# Altium PCB msr50.PcbDoc (part 4 of 8)
Units mil, origin at the board's own origin, x right, y up, seen from the top; angles counter-clockwise.
Board outline 3925 x 3925 mil, 2 copper layers (TopLayer, BottomLayer); 109 components, 122 nets, 846 pads, 52 vias.
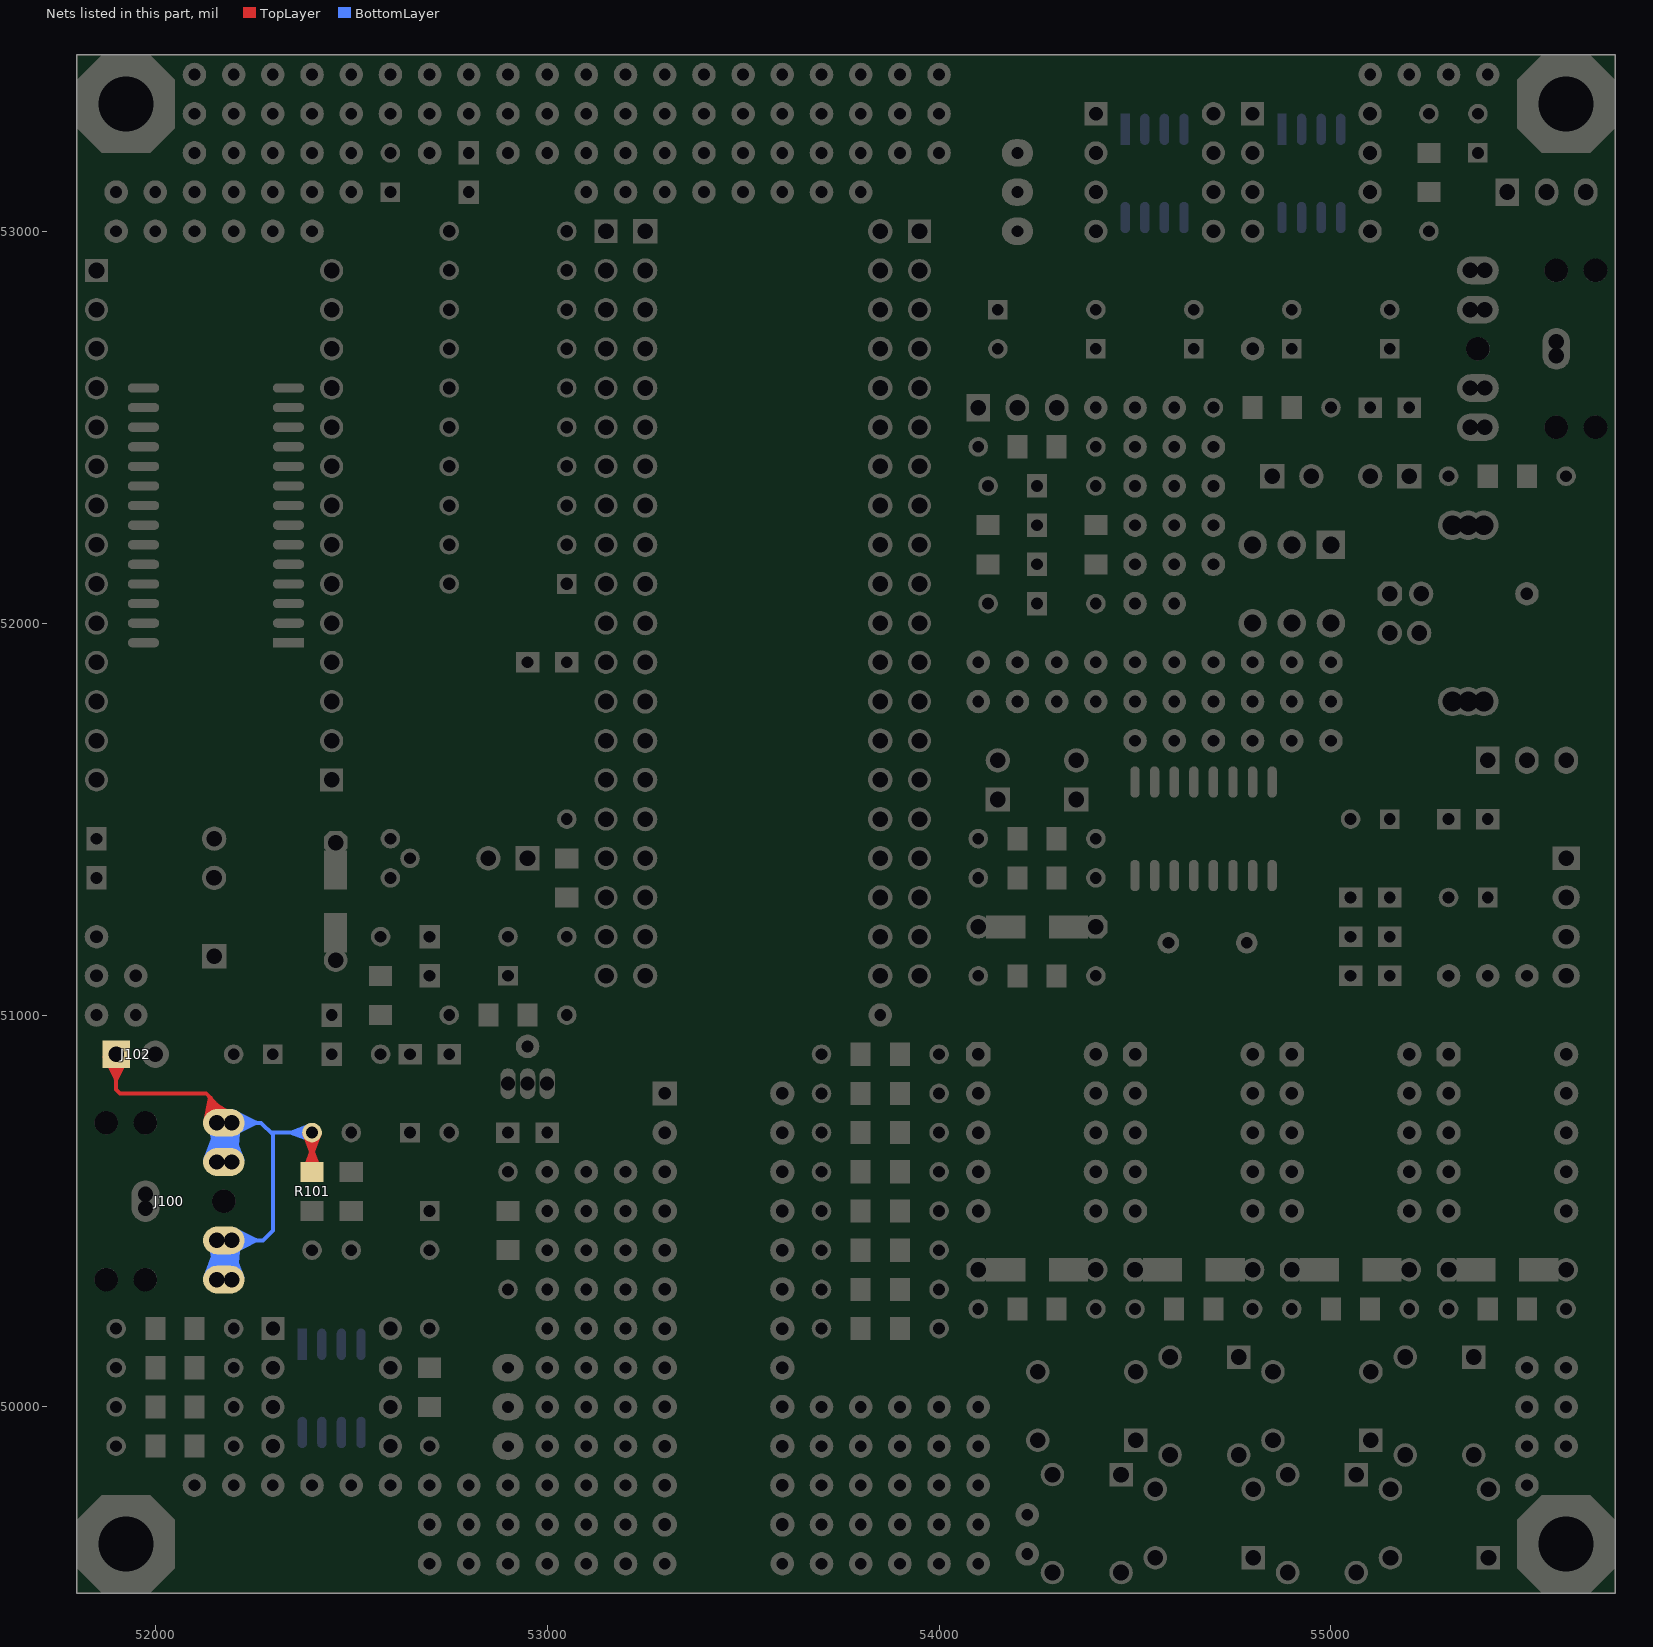
[diagram p4: the nets of this part, all layers, seen from the top]

## Via types
v1: diameter 30, hole 14, TopLayer to BottomLayer, 40 vias
v2: diameter 50, hole 28, TopLayer to BottomLayer, 12 vias

## Nets (pads, with @x,y where several pads share a name; then routed paths per layer and width w, separated by ;. In a path a pad name is that pad's centre, name@x,y a point inside that pad or via, vN(x,y) a via of type N, cw(c..) or ccw(c..) an arc to the next point about the centre after c; other vN are vias at no path point) (continued)
NetJ100_2: (continued)
  BottomLayer w10: J100.5@52127.07,50328.67 J100.4@52150.43,50394.68 ; J100.3@52127.07,50628.67 J100.2@52150.43,50694.68 ; J100.5@52136.87,50325.99 J100.4@52150.43,50394.68 ; J100.3@52136.87,50625.99 J100.2@52150.43,50694.68 ; J100.5@52138.66,50325.1 52148.29,50383.84 ; J100.5@52138.67,50325.58 52149.67,50379.89 ; J100.3@52138.66,50625.1 52148.29,50683.84 ; J100.3@52138.67,50625.58 52149.67,50679.89 ; J100.5@52138.72,50326.42 52152.02,50378.48 ; J100.4@52138.69,50424.06 52150.93,50366.11 ; J100.3@52138.72,50626.42 52152.02,50678.48 ; J100.2@52138.68,50724.06 52150.93,50666.11 ; J100.5@52138.74,50326.72 52153.1,50380.78 ; J100.5@52138.77,50327.05 52154.05,50380.32 ; J100.4@52138.74,50423.25 52153.58,50365.06 ; J100.3@52138.74,50626.72 52153.1,50680.78 ; J100.3@52138.77,50627.05 52154.05,50680.32 ; J100.2@52138.74,50723.25 52153.58,50665.06 ; J100.5@52138.78,50327.09 52154.64,50384.47 ; J100.5@52138.82,50327.4 52155.14,50380.72 ; J100.4@52138.82,50422.6 52155.14,50369.28 ; J100.4@52138.81,50422.68 52155.31,50365.95 ; J100.3@52138.78,50627.09 52154.64,50684.47 ; J100.3@52138.82,50627.4 52155.14,50680.72 ; J100.2@52138.82,50722.6 52155.14,50669.28 ; J100.2@52138.81,50722.68 52155.31,50665.95 ; J100.5@52138.85,50327.61 52155.48,50378.7 ; J100.3@52138.85,50627.61 52155.48,50678.7 ; J100.5@52138.91,50328.06 52156.78,50378.71 ; J100.5@52138.92,50328.09 52157.29,50381.23 ; J100.4@52138.91,50421.94 52156.78,50371.29 ; J100.3@52138.91,50628.06 52156.78,50678.71 ; J100.3@52138.92,50628.09 52157.29,50681.23 ; J100.2@52138.91,50721.94 52156.78,50671.29 ; J100.5@52138.94,50328.23 52157.28,50378.62 ; J100.5@52138.97,50328.39 J100.4@52162.05,50401.91 ; J100.4@52138.97,50421.6 52158.65,50366.65 ; J100.4@52138.94,50421.77 52157.28,50371.38 ; J100.3@52138.94,50628.23 52157.28,50678.62 ; J100.3@52138.97,50628.39 J100.2@52162.05,50701.91 ; J100.2@52138.97,50721.6 52158.65,50666.65 ; J100.2@52138.94,50721.77 52157.28,50671.38 ; J100.5@52138.97,50328.4 52159.4,50387.34 ; J100.5@52138.98,50328.44 52158.05,50379.43 ; J100.5@52139.01,50328.59 52160.17,50388.07 ; J100.5@52139.02,50328.66 52158.67,50379.36 ; J100.4@52138.98,50421.6 52159.4,50362.66 ; J100.3@52138.97,50628.4 52159.4,50687.34 ; J100.3@52138.98,50628.44 52158.05,50679.43 ; J100.3@52139.01,50628.59 52160.17,50688.07 ; J100.3@52139.02,50628.66 52158.67,50679.36 ; J100.2@52138.97,50721.6 52159.4,50662.66 ; J100.4@52139.06,50421.18 52159.83,50367.44 ; J100.2@52139.06,50721.18 52159.83,50667.44 ; J100.5@52139.11,50329.08 52159.82,50378.72 ; J100.4@52139.1,50420.98 J100.5@52163.04,50355.84 ; J100.4@52139.08,50421.08 52161.39,50361.73 ; J100.3@52139.11,50629.08 52159.82,50678.72 ; J100.2@52139.1,50720.98 J100.3@52163.04,50655.84 ; J100.2@52139.08,50721.08 52161.39,50661.73 ; J100.5@52139.33,50329.96 J100.4@52169.49,50404.1 ; J100.5@52139.35,50330.01 52162.79,50379.28 ; J100.4@52139.36,50419.94 52164.92,50363.63 ; J100.4@52139.33,50420.04 52163.14,50368.83 ; J100.3@52139.33,50629.96 J100.2@52169.49,50704.1 ; J100.3@52139.35,50630.01 52162.79,50679.28 ; J100.2@52139.36,50719.94 52164.92,50663.63 ; J100.2@52139.33,50720.04 52163.14,50668.83 ; J100.5@52139.48,50330.45 52165.25,50382.86 ; J100.4@52139.52,50419.4 52166.96,50363.34 ; J100.3@52139.48,50630.45 52165.25,50682.86 ; J100.2@52139.52,50719.4 52166.96,50663.34 ; J100.4@52139.57,50419.25 J100.5@52169.69,50356.67 ; J100.2@52139.57,50719.25 J100.3@52169.69,50656.67 ; J100.5@52139.72,50331.19 52167.42,50381.75 ; J100.3@52139.72,50631.19 52167.42,50681.75 ; J100.4@52139.82,50418.53 52167.16,50371.55 ; J100.2@52139.82,50718.53 52167.16,50671.55 ; J100.5@52139.87,50331.61 J100.4@52177.71,50405.04 ; J100.4@52139.84,50418.47 52170.54,50363 ; J100.3@52139.87,50631.61 J100.2@52177.71,50705.04 ; J100.2@52139.84,50718.47 52170.54,50663 ; J100.5@52139.89,50331.66 52167.92,50378.8 ; J100.3@52139.89,50631.66 52167.92,50678.8 ; J100.4@52139.97,50418.15 52171.06,50364.9 ; J100.2@52139.97,50718.15 52171.06,50664.9 ; J100.5@52140.08,50332.14 52171.01,50382.36 ; J100.4@52140.12,50417.77 52172.17,50365.72 ; J100.3@52140.08,50632.14 52171.01,50682.36 ; J100.2@52140.12,50717.77 52172.17,50665.72 ; J100.4@52140.15,50417.7 52171.36,50368.23 ; J100.2@52140.15,50717.7 52171.36,50668.23 ; J100.4@52140.21,50417.56 J100.5@52176.13,50358.42 ; J100.2@52140.21,50717.56 J100.3@52176.13,50658.42 ; J100.5@52140.36,50332.76 52173.05,50381.71 ; J100.4@52140.34,50417.27 52171.54,50371.29 ; J100.3@52140.36,50632.76 52173.05,50681.71 ; J100.2@52140.34,50717.27 52171.54,50671.29 ; J100.4@52140.46,50417.01 52176.39,50363.06 ; J100.2@52140.46,50717.01 52176.39,50663.06 ; J100.5@52140.61,50333.29 52173.22,50377.95 ; J100.3@52140.61,50633.29 52173.22,50677.95 ; J100.4@52140.79,50416.35 52176.29,50368.7 ; J100.2@52140.79,50716.35 52176.29,50668.7 ; J100.4@52140.85,50416.25 52176.71,50368.7 ; J100.2@52140.85,50716.25 52176.71,50668.7 ; J100.5@52140.88,50333.81 52174.92,50377.54 ; J100.5@52140.9,50333.86 52176.95,50380.93 ; J100.3@52140.88,50633.81 52174.92,50677.54 ; J100.3@52140.9,50633.86 52176.95,50680.93 ; J100.4@52140.94,50416.08 52176.47,50370.43 ; J100.2@52140.94,50716.08 52176.47,50670.43 ; J100.4@52140.98,50416 52181.97,50361.01 ; J100.2@52140.98,50716 52181.97,50661.01 ; J100.5@52141.43,50334.77 52178.6,50377.34 ; J100.5@52141.47,50334.83 52178.5,50376.79 ; J100.3@52141.43,50634.77 52178.6,50677.34 ; J100.3@52141.47,50634.83 52178.5,50676.79 ; J100.4@52141.54,50415.06 52181.25,50369.58 ; J100.2@52141.54,50715.06 52181.25,50669.58 ; J100.4@52141.58,50414.99 52181.27,50370.06 ; J100.2@52141.58,50714.99 52181.27,50670.06 ; J100.4@52141.63,50414.91 52180.44,50371.92 ; J100.2@52141.63,50714.91 52180.44,50671.92 ; J100.4@52141.69,50414.83 52181.94,50370.14 ; J100.2@52141.69,50714.83 52181.94,50670.14 ; J100.4@52141.83,50414.61 52186.92,50364.23 ; J100.2@52141.83,50714.61 52186.92,50664.23 ; J100.4@52142.11,50414.2 52184.45,50370.8 ; J100.2@52142.11,50714.2 52184.45,50670.8 ; J100.5@52142.15,50335.85 52183.81,50378.01 ; J100.3@52142.15,50635.85 52183.81,50678.01 ; J100.4@52142.25,50414.01 52185.24,50370.97 ; J100.2@52142.25,50714.01 52185.24,50670.97 ; J100.5@52142.28,50336.03 52182.74,50375.33 ; J100.3@52142.28,50636.03 52182.74,50675.33 ; J100.5@52142.36,50336.14 52185.8,50378.73 ; J100.4@52142.35,50413.88 52186,50370.84 ; J100.3@52142.36,50636.14 52185.8,50678.73 ; J100.2@52142.35,50713.88 52186,50670.84 ; J100.5@52142.4,50336.2 52185.94,50378.56 ; J100.3@52142.4,50636.2 52185.94,50678.56 ; J100.5@52142.43,50336.23 52186.18,50378.67 ; J100.4@52142.47,50413.71 52183.9,50374.71 ; J100.3@52142.43,50636.23 52186.18,50678.67 ; J100.2@52142.47,50713.71 52183.9,50674.71 ; J100.5@52142.8,50336.7 52188.3,50378.19 ; J100.5@52142.82,50336.73 52187.28,50376.78 ; J100.4@52142.78,50413.32 52191.14,50368.08 ; J100.3@52142.8,50636.7 52188.3,50678.19 ; J100.3@52142.82,50636.73 52187.28,50676.78 ; J100.2@52142.78,50713.32 52191.14,50668.08 ; J100.5@52142.88,50336.81 52191.65,50381.6 ; J100.5@52142.9,50336.83 52189.17,50378.44 ; J100.3@52142.88,50636.81 52191.65,50681.6 ; J100.3@52142.9,50636.83 52189.17,50678.44 ; J100.5@52142.98,50336.92 52189.03,50377.65 ; J100.3@52142.98,50636.92 52189.03,50677.65 ; J100.5@52143.25,50337.24 52190.48,50377.23 ; J100.4@52143.25,50412.76 52190.7,50372.49 ; J100.3@52143.25,50637.24 52190.48,50677.23 ; J100.2@52143.25,50712.76 52190.7,50672.49 ; J100.5@52143.37,50337.38 52191.08,50376.98 ; J100.3@52143.37,50637.38 52191.08,50676.98 ; J100.4@52143.74,50412.22 52192.95,50373.61 ; J100.2@52143.74,50712.22 52192.95,50673.61 ; J100.4@52143.83,50412.12 52193.26,50373.94 ; J100.2@52143.83,50712.12 52193.26,50673.94 ; J100.5@52143.88,50337.92 52193.48,50375.96 ; J100.3@52143.88,50637.92 52193.48,50675.96 ; J100.5@52144.35,50338.4 52195.68,50375.02 ; J100.3@52144.35,50638.4 52195.68,50675.02 ; J100.5@52144.43,50338.47 52196.1,50374.9 ; J100.3@52144.43,50638.47 52196.1,50674.9 ; J100.4@52144.53,50411.43 52196.52,50375.38 ; J100.2@52144.53,50711.43 52196.52,50675.38 ; J100.5@52144.61,50323.35 J100.4@52155.75,50398.74 ; J100.5@52144.59,50323.87 J100.4@52157.28,50392.23 ; J100.5@52144.58,50325.9 J100.4@52162.05,50401.91 ; J100.4@52144.59,50426.13 J100.5@52157.28,50357.77 ; J100.3@52144.61,50623.35 J100.2@52155.75,50698.74 ; J100.3@52144.59,50623.87 J100.2@52157.28,50692.23 ; J100.3@52144.58,50625.9 J100.2@52162.05,50701.91 ; J100.2@52144.59,50726.13 J100.3@52157.28,50657.77 ; J100.5@52144.8,50328.75 J100.4@52169.49,50404.1 ; J100.3@52144.8,50628.75 J100.2@52169.49,50704.1 ; J100.4@52145.17,50410.86 52199.31,50376.74 ; J100.2@52145.17,50710.86 52199.31,50676.74 ; J100.5@52145.33,50331.79 J100.4@52177.71,50405.04 ; J100.3@52145.33,50631.79 J100.2@52177.71,50705.04 ; J100.4@52145.85,50410.3 52202.18,50378.27 ; J100.2@52145.85,50710.3 52202.18,50678.27 ; J100.5@52146.21,50334.86 J100.4@52186.2,50404.66 ; J100.3@52146.21,50634.86 J100.2@52186.2,50704.66 ; J100.5@52146.85,50324.75 J100.4@52150.43,50394.68 ; J100.3@52146.85,50624.75 J100.2@52150.43,50694.68 ; J100.5@52148.66,50324.85 52152.02,50378.48 ; J100.5@52148.66,50325.02 52153.1,50380.78 ; J100.5@52148.66,50325.24 52154.64,50384.47 ; J100.5@52148.67,50325.34 52155.14,50380.72 ; J100.5@52148.67,50325.4 52155.48,50378.7 ; J100.4@52148.67,50424.62 J100.5@52155.99,50355.89 ; J100.4@52148.67,50424.68 52155.32,50360.85 ; J100.4@52148.66,50424.91 52153.58,50365.06 ; J100.4@52148.67,50425.3 52150.93,50366.11 ; J100.3@52148.66,50624.85 52152.02,50678.48 ; J100.3@52148.66,50625.02 52153.1,50680.78 ; J100.3@52148.66,50625.24 52154.64,50684.47 ; J100.3@52148.67,50625.34 52155.14,50680.72 ; J100.3@52148.67,50625.4 52155.48,50678.7 ; J100.2@52148.67,50724.62 J100.3@52155.99,50655.89 ; J100.2@52148.67,50724.68 52155.32,50660.85 ; J100.2@52148.66,50724.91 52153.58,50665.06 ; J100.2@52148.67,50725.3 52150.93,50666.11 ; J100.5@52148.69,50324.32 52148.29,50383.84 ; J100.5@52148.68,50324.48 52149.67,50379.89 ; J100.5@52148.68,50325.61 52156.78,50378.71 ; J100.5@52148.69,50325.66 52157.29,50381.23 ; J100.5@52148.69,50325.69 52157.28,50378.62 ; J100.5@52148.7,50325.8 52158.05,50379.43 ; J100.5@52148.72,50326.03 52159.89,50382.89 ; J100.4@52148.72,50423.98 52159.83,50367.44 ; J100.4@52148.72,50424.03 52159.79,50364.79 ; J100.4@52148.7,50424.16 52158.65,50366.65 ; J100.4@52148.69,50424.31 52157.28,50371.38 ; J100.4@52148.68,50424.39 52156.78,50371.29 ; J100.3@52148.69,50624.32 52148.29,50683.84 ; J100.3@52148.68,50624.48 52149.67,50679.89 ; J100.3@52148.68,50625.61 52156.78,50678.71 ; J100.3@52148.69,50625.66 52157.29,50681.23 ; J100.3@52148.69,50625.69 52157.28,50678.62 ; J100.3@52148.7,50625.8 52158.05,50679.43 ; J100.3@52148.72,50626.03 52159.89,50682.89 ; J100.2@52148.72,50723.98 52159.83,50667.44 ; J100.2@52148.72,50724.03 52159.79,50664.79 ; J100.2@52148.7,50724.16 52158.65,50666.65 ; J100.2@52148.69,50724.31 52157.28,50671.38 ; J100.2@52148.68,50724.39 52156.78,50671.29 ; J100.5@52148.73,50326.09 52159.82,50378.72 ; J100.5@52148.77,50326.38 52162.11,50381.58 ; J100.4@52148.75,50423.75 J100.5@52163.04,50355.84 ; J100.4@52148.74,50423.86 52161.39,50361.73 ; J100.3@52148.73,50626.09 52159.82,50678.72 ; J100.3@52148.77,50626.38 52162.11,50681.58 ; J100.2@52148.75,50723.75 J100.3@52163.04,50655.84 ; J100.2@52148.74,50723.86 52161.39,50661.73 ; J100.5@52148.8,50326.55 52162.79,50379.28 ; J100.4@52148.8,50423.45 52163.14,50368.83 ; J100.3@52148.8,50626.55 52162.79,50679.28 ; J100.2@52148.8,50723.45 52163.14,50668.83 ; J100.5@52148.85,50326.8 52165.25,50382.86 ; J100.5@52148.86,50326.85 52164.61,50378.55 ; J100.3@52148.85,50626.8 52165.25,50682.86 ; J100.3@52148.86,50626.85 52164.61,50678.55 ; J100.4@52148.88,50423.08 52166.96,50363.34 ; J100.2@52148.88,50723.08 52166.96,50663.34 ; J100.4@52148.96,50422.77 52167.16,50371.55 ; J100.2@52148.96,50722.77 52167.16,50671.55 ; J100.5@52149.05,50327.57 J100.4@52177.71,50405.04 ; J100.4@52149.03,50422.49 52171.06,50364.9 ; J100.3@52149.05,50627.57 J100.2@52177.71,50705.04 ; J100.2@52149.03,50722.49 52171.06,50664.9 ; J100.5@52149.17,50327.91 52173.05,50381.71 ; J100.3@52149.17,50627.91 52173.05,50681.71 ; J100.5@52149.25,50328.12 52173.22,50377.95 ; J100.4@52149.23,50421.92 52176.39,50363.06 ; J100.3@52149.25,50628.12 52173.22,50677.95 ; J100.2@52149.23,50721.92 52176.39,50663.06 ; J100.5@52149.37,50328.42 52176.91,50381.32 ; J100.4@52149.36,50421.6 52176.71,50368.7 ; J100.4@52149.34,50421.66 52176.29,50368.7 ; J100.3@52149.37,50628.42 52176.91,50681.32 ; J100.2@52149.36,50721.6 52176.71,50668.7 ; J100.2@52149.34,50721.66 52176.29,50668.7 ; J100.5@52149.38,50328.44 52176.95,50380.93 ; J100.4@52149.39,50421.54 52176.47,50370.43 ; J100.3@52149.38,50628.44 52176.95,50680.93 ; J100.2@52149.39,50721.54 52176.47,50670.43 ; J100.4@52149.45,50421.4 52181.97,50361.01 ; J100.2@52149.45,50721.4 52181.97,50661.01 ; J100.4@52149.52,50421.25 52179.28,50369.54 ; J100.2@52149.52,50721.25 52179.28,50669.54 ; J100.5@52149.57,50328.85 52178.6,50377.34 ; J100.4@52149.56,50408.05 J100.4@52199.79,50395.4 ; J100.4@52149.55,50421.18 52182.68,50363.86 ; J100.4@52149.56,50441.95 J100.4@52199.79,50454.6 ; J100.3@52149.57,50628.85 52178.6,50677.34 ; J100.2@52149.56,50708.05 J100.2@52199.79,50695.4 ; J100.2@52149.55,50721.18 52182.68,50663.86 ; J100.2@52149.56,50741.95 J100.2@52199.79,50754.6 ; J100.5@52149.58,50328.87 52178.5,50376.79 ; J100.5@52149.62,50328.96 52180.25,50378.8 ; J100.3@52149.58,50628.87 52178.5,50676.79 ; J100.3@52149.62,50628.96 52180.25,50678.8 ; J100.5@52149.63,50328.97 52180.95,50380.03 ; J100.4@52149.66,50420.97 52180.44,50371.92 ; J100.3@52149.63,50628.97 52180.95,50680.03 ; J100.2@52149.66,50720.97 52180.44,50671.92 ; J100.4@52149.69,50420.91 52181.94,50370.14 ; J100.2@52149.69,50720.91 52181.94,50670.14 ; J100.4@52149.79,50420.73 52186.92,50364.23 ; J100.2@52149.79,50720.73 52186.92,50664.23 ; J100.5@52149.87,50329.41 52183.81,50378.01 ; J100.4@52149.87,50420.6 52184.45,50370.8 ; J100.3@52149.87,50629.41 52183.81,50678.01 ; J100.2@52149.87,50720.6 52184.45,50670.8 ; J100.5@52149.91,50329.47 52182.74,50375.33 ; J100.3@52149.91,50629.47 52182.74,50675.33 ; J100.5@52149.97,50329.57 52185.8,50378.73 ; J100.4@52149.97,50420.44 52186,50370.84 ; J100.4@52149.93,50420.51 52185.24,50370.97 ; J100.3@52149.97,50629.57 52185.8,50678.73 ; J100.2@52149.97,50720.44 52186,50670.84 ; J100.2@52149.93,50720.51 52185.24,50670.97 ; J100.4@52149.99,50420.4 52183.9,50374.71 ; J100.2@52149.99,50720.4 52183.9,50674.71 ; J100.5@52150.2,50329.92 52189.17,50378.44 ; J100.5@52150.22,50329.95 52191.65,50381.6 ; J100.4@52150.22,50420.05 52189.08,50372.14 ; J100.4@52150.18,50420.12 52191.14,50368.08 ; J100.3@52150.2,50629.92 52189.17,50678.44 ; J100.3@52150.22,50629.95 52191.65,50681.6 ; J100.2@52150.22,50720.05 52189.08,50672.14 ; J100.2@52150.18,50720.12 52191.14,50668.08 ; J100.5@52150.23,50329.96 52189.03,50377.65 ; J100.4@52150.23,50420.04 52189.05,50372.29 ; J100.3@52150.23,50629.96 52189.03,50677.65 ; J100.2@52150.23,50720.04 52189.05,50672.29 ; J100.5@52150.35,50330.12 52190.48,50377.23 ; J100.4@52150.35,50419.88 52190.7,50372.49 ; J100.3@52150.35,50630.12 52190.48,50677.23 ; J100.2@52150.35,50719.88 52190.7,50672.49 ; J100.5@52150.4,50330.19 52191.08,50376.98 ; J100.3@52150.4,50630.19 52191.08,50676.98 ; J100.4@52150.56,50419.61 52192.95,50373.61 ; J100.2@52150.56,50719.61 52192.95,50673.61 ; J100.5@52150.61,50330.47 52193.48,50375.96 ; J100.4@52150.6,50419.56 52193.26,50373.94 ; J100.3@52150.61,50630.47 52193.48,50675.96 ; J100.2@52150.59,50719.56 52193.26,50673.94 ; J100.5@52150.82,50330.7 52195.68,50375.02 ; J100.3@52150.82,50630.7 52195.68,50675.02 ; J100.5@52150.85,50330.75 52196.1,50374.9 ; J100.3@52150.85,50630.75 52196.1,50674.9 ; J100.4@52150.9,50419.2 52196.52,50375.38 ; J100.2@52150.9,50719.2 52196.52,50675.38 ; J100.4@52151.18,50418.91 52199.31,50376.74 ; J100.2@52151.18,50718.91 52199.31,50676.74 ; J100.4@52151.48,50418.63 52202.18,50378.27 ; J100.2@52151.48,50718.63 52202.18,50678.27 ; J100.4@52152.69,50406.95 J100.4@52190.4,50406.95 ; J100.4@52152.69,50443.05 J100.4@52190.4,50443.05 ; J100.2@52152.69,50706.95 J100.2@52190.4,50706.95 ; J100.2@52152.69,50743.05 J100.2@52190.4,50743.05 ; J100.4@52152.96,50417.54 J100.4@52199.79,50395.4 ; J100.4@52152.96,50432.46 J100.4@52199.79,50454.6 ; J100.2@52152.96,50717.54 J100.2@52199.79,50695.4 ; J100.2@52152.96,50732.46 J100.2@52199.79,50754.6 ; J100.4@52154.05,50417.01 J100.4@52190.4,50406.95 ; J100.4@52154.05,50432.99 J100.4@52190.4,50443.05 ; J100.2@52154.05,50717.01 J100.2@52190.4,50706.95 ; J100.2@52154.05,50732.99 J100.2@52190.4,50743.05 ; J100.5@52154.58,50324.27 J100.4@52162.05,50401.91 ; J100.5@52154.6,50326.22 J100.4@52169.49,50404.1 ; J100.3@52154.58,50624.27 J100.2@52162.05,50701.91 ; J100.3@52154.6,50626.22 J100.2@52169.49,50704.1 ; J100.5@52154.72,50322.54 J100.4@52155.75,50398.74 ; J100.5@52154.69,50322.75 J100.4@52157.28,50392.23 ; J100.4@52154.69,50427.25 J100.5@52157.28,50357.77 ; J100.3@52154.72,50622.54 J100.2@52155.75,50698.74 ; J100.3@52154.69,50622.75 J100.2@52157.28,50692.23 ; J100.2@52154.69,50727.25 J100.3@52157.28,50657.77 ; J100.5@52154.83,50328.29 J100.4@52177.71,50405.04 ; J100.3@52154.83,50628.29 J100.2@52177.71,50705.04 ; J100.5@52155.29,50330.39 J100.4@52186.2,50404.66 ; J100.3@52155.29,50630.39 J100.2@52186.2,50704.66 ; J100.4@52156.3,50416.43 J100.4@52194.01,50416.43 ; J100.4@52156.3,50433.57 J100.4@52194.01,50433.57 ; J100.2@52156.3,50716.43 J100.2@52194.01,50716.43 ; J100.2@52156.3,50733.57 J100.2@52194.01,50733.57 ; J100.5@52157.32,50316.38 J100.5@52187.47,50320.8 ; J100.3@52157.32,50616.38 J100.3@52187.47,50620.8 ; J100.4@52157.33,50433.62 J100.4@52187.44,50429.15 ; J100.2@52157.33,50733.62 J100.2@52187.44,50729.15 ; J100.5@52157.4,50316.38 J100.5@52187.32,50321.09 ; J100.3@52157.4,50616.38 J100.3@52187.32,50621.09 ; J100.5@52157.43,50316.38 J100.5@52187.26,50321.19 ; J100.3@52157.43,50616.38 J100.3@52187.26,50621.19 ; J100.4@52157.51,50433.62 J100.4@52187.13,50428.53 ; J100.2@52157.51,50733.62 J100.2@52187.13,50728.53 ; J100.5@52157.57,50316.38 J100.5@52187.05,50321.67 ; J100.3@52157.57,50616.38 J100.3@52187.05,50621.67 ; J100.4@52157.59,50433.62 J100.4@52187.02,50428.25 ; J100.2@52157.59,50733.62 J100.2@52187.02,50728.25 ; J100.4@52157.66,50406.38 J100.4@52194.01,50416.43 ; J100.4@52157.66,50443.62 J100.4@52194.01,50433.57 ; J100.2@52157.66,50706.38 J100.2@52194.01,50716.43 ; J100.2@52157.66,50743.62 J100.2@52194.01,50733.57 ; J100.5@52157.68,50316.39 J100.5@52186.9,50322.04 ; J100.3@52157.68,50616.39 J100.3@52186.9,50622.04 ; J100.5@52157.83,50316.4 J100.5@52186.73,50322.55 ; J100.5@52157.87,50333.6 J100.5@52185.15,50327.42 ; J100.3@52157.83,50616.4 J100.3@52186.73,50622.55 ; J100.3@52157.87,50633.6 J100.3@52185.15,50627.42 ; J100.5@52157.89,50316.4 J100.5@52186.68,50322.75 ; J100.3@52157.89,50616.4 J100.3@52186.68,50622.75 ; J100.4@52157.93,50433.6 J100.4@52186.64,50427.11 ; J100.2@52157.93,50733.6 J100.2@52186.64,50727.11 ; J100.5@52158.18,50333.58 J100.5@52185.34,50326.41 ; J100.3@52158.18,50633.58 J100.3@52185.34,50626.41 ; J100.5@52158.37,50316.45 J100.5@52185.4,50324.22 ; J100.3@52158.37,50616.45 J100.3@52185.4,50624.22 ; J100.5@52158.5,50333.54 J100.5@52185.43,50325.33 ; J100.3@52158.5,50633.54 J100.3@52185.43,50625.33 ; J100.5@52158.7,50316.5 J100.5@52185.43,50325.33 ; J100.3@52158.7,50616.5 J100.3@52185.43,50625.33 ; J100.5@52158.84,50333.48 J100.5@52185.4,50324.22 ; J100.3@52158.84,50633.48 J100.3@52185.4,50624.22 ; J100.5@52159.03,50316.56 J100.5@52185.34,50326.41 ; J100.3@52159.03,50616.56 J100.3@52185.34,50626.41 ; J100.4@52159.15,50416.58 J100.4@52186.64,50427.11 ; J100.2@52159.15,50716.58 J100.2@52186.64,50727.11 ; J100.5@52159.19,50333.41 J100.5@52186.68,50322.75 ; J100.3@52159.19,50633.41 J100.3@52186.68,50622.75 ; J100.5@52159.24,50333.4 J100.5@52186.73,50322.55 ; J100.3@52159.24,50633.4 J100.3@52186.73,50622.55 ; J100.5@52159.3,50333.38 J100.5@52186.8,50322.33 ; J100.3@52159.3,50633.38 J100.3@52186.8,50622.33 ; J100.5@52159.34,50316.63 J100.5@52185.15,50327.42 ; J100.5@52159.33,50333.37 J100.5@52186.84,50322.2 ; J100.3@52159.34,50616.63 J100.3@52185.15,50627.42 ; J100.3@52159.33,50633.37 J100.3@52186.84,50622.2 ; J100.5@52159.38,50333.36 J100.5@52186.9,50322.04 ; J100.3@52159.38,50633.36 J100.3@52186.9,50622.04 ; J100.4@52159.66,50416.71 J100.4@52187.44,50429.15 ; J100.2@52159.66,50716.71 J100.2@52187.44,50729.15 ; J100.5@52160.14,50306.6 J100.5@52187.77,50320.31 ; J100.3@52160.14,50606.6 J100.3@52187.77,50620.31 ; J100.5@52160.22,50306.61 J100.5@52187.69,50320.42 ; J100.4@52160.19,50416.88 J100.4@52194.01,50433.57 ; J100.4@52160.19,50433.12 J100.4@52194.01,50416.43 ; J100.3@52160.22,50606.61 J100.3@52187.69,50620.42 ; J100.2@52160.19,50716.88 J100.2@52194.01,50733.57 ; J100.2@52160.19,50733.12 J100.2@52194.01,50716.43 ; J100.5@52160.47,50306.65 J100.5@52187.47,50320.8 ; J100.3@52160.47,50606.65 J100.3@52187.47,50620.8 ; J100.4@52160.51,50443.34 J100.4@52187.44,50429.15 ; J100.2@52160.51,50743.34 J100.2@52187.44,50729.15 ; J100.5@52160.67,50306.69 J100.5@52187.32,50321.09 ; J100.3@52160.67,50606.69 J100.3@52187.32,50621.09 ; J100.5@52160.74,50306.7 J100.5@52187.26,50321.19 ; J100.3@52160.74,50606.7 J100.3@52187.26,50621.19 ; J100.4@52160.93,50443.26 J100.4@52187.13,50428.53 ; J100.2@52160.93,50743.26 J100.2@52187.13,50728.53 ; J100.5@52161.07,50306.77 J100.5@52187.05,50321.67 ; J100.4@52161.04,50443.24 J100.4@52187.06,50428.37 ; J100.3@52161.07,50606.77 J100.3@52187.05,50621.67 ; J100.2@52161.04,50743.24 J100.2@52187.06,50728.37 ; J100.5@52161.12,50306.78 J100.5@52187.02,50321.75 ; J100.4@52161.12,50443.22 J100.4@52187.02,50428.25 ; J100.4@52161.08,50443.23 J100.4@52187.04,50428.31 ; J100.3@52161.12,50606.78 J100.3@52187.02,50621.75 ; J100.2@52161.12,50743.22 J100.2@52187.02,50728.25 ; J100.2@52161.08,50743.23 J100.2@52187.04,50728.31 ; J100.5@52161.17,50306.79 J100.5@52186.99,50321.82 ; J100.3@52161.17,50606.79 J100.3@52186.99,50621.82 ; J100.5@52161.32,50306.82 J100.5@52186.9,50322.04 ; J100.3@52161.32,50606.82 J100.3@52186.9,50622.04 ; J100.5@52161.43,50306.85 J100.5@52186.84,50322.2 ; J100.3@52161.43,50606.85 J100.3@52186.84,50622.2 ; J100.5@52161.52,50306.87 J100.5@52186.8,50322.33 ; J100.4@52161.48,50443.14 J100.4@52186.82,50427.73 ; J100.3@52161.52,50606.87 J100.3@52186.8,50622.33 ; J100.2@52161.48,50743.14 J100.2@52186.82,50727.73 ; J100.4@52161.53,50443.13 J100.4@52186.8,50427.65 ; J100.2@52161.53,50743.13 J100.2@52186.8,50727.65 ; J100.5@52161.66,50306.9 J100.5@52186.73,50322.55 ; J100.3@52161.66,50606.9 J100.3@52186.73,50622.55 ; J100.5@52161.8,50306.93 J100.5@52186.68,50322.75 ; J100.3@52161.8,50606.93 J100.3@52186.68,50622.75 ; J100.5@52161.94,50343.03 J100.5@52185.15,50327.42 ; J100.3@52161.94,50643.03 J100.3@52185.15,50627.42 ; J100.4@52162.25,50417.95 J100.4@52190.4,50443.05 ; J100.4@52162.25,50432.05 J100.4@52190.4,50406.95 ; J100.2@52162.25,50717.95 J100.2@52190.4,50743.05 ; J100.2@52162.25,50732.05 J100.2@52190.4,50706.95 ; J100.5@52162.57,50342.86 J100.5@52185.34,50326.41 ; J100.3@52162.57,50642.86 J100.3@52185.34,50626.41 ; J100.4@52162.78,50418.36 J100.4@52199.79,50454.6 ; J100.4@52162.78,50431.64 J100.4@52199.79,50395.4 ; J100.2@52162.78,50718.36 J100.2@52199.79,50754.6 ; J100.2@52162.78,50731.64 J100.2@52199.79,50695.4 ; J100.5@52162.96,50307.26 J100.5@52185.4,50324.22 ; J100.3@52162.96,50607.26 J100.3@52185.4,50624.22 ; J100.5@52163.08,50331.9 J100.4@52195.23,50402.91 ; J100.3@52163.08,50631.9 J100.2@52195.23,50702.91 ; J100.5@52163.24,50342.64 J100.5@52185.43,50325.33 ; J100.3@52163.24,50642.64 J100.3@52185.43,50625.33 ; J100.5@52163.65,50307.5 J100.5@52185.43,50325.33 ; J100.3@52163.65,50607.5 J100.3@52185.43,50625.33 ; J100.4@52163.88,50430.55 52202.18,50378.27 ; J100.2@52163.88,50730.55 52202.18,50678.27 ; J100.5@52163.93,50342.39 J100.5@52185.4,50324.22 ; J100.3@52163.93,50642.39 J100.3@52185.4,50624.22 ; J100.4@52164.15,50430.21 52199.31,50376.74 ; J100.2@52164.15,50730.21 52199.31,50676.74 ; J100.5@52164.33,50307.76 J100.5@52185.34,50326.41 ; J100.3@52164.33,50607.76 J100.3@52185.34,50626.41 ; J100.4@52164.4,50429.87 52196.52,50375.38 ; J100.2@52164.42,50707.8 J100.2@52186.64,50727.11 ; J100.2@52164.4,50729.87 52196.52,50675.38 ; J100.5@52164.43,50320.18 52196.1,50374.9 ; J100.5@52164.47,50320.23 52195.68,50375.02 ; J100.4@52164.43,50407.8 J100.4@52186.64,50427.11 ; J100.3@52164.43,50620.18 52196.1,50674.9 ; J100.3@52164.47,50620.23 52195.68,50675.02 ; J100.5@52164.5,50342.17 J100.5@52186.68,50322.75 ; J100.3@52164.5,50642.17 J100.3@52186.68,50622.75 ; J100.5@52164.57,50324.96 J100.4@52169.49,50404.1 ; J100.3@52164.57,50624.96 J100.2@52169.49,50704.1 ; J100.5@52164.62,50323.96 J100.4@52162.05,50401.91 ; J100.5@52164.62,50326.03 J100.4@52177.71,50405.04 ; J100.5@52164.6,50342.13 J100.5@52186.73,50322.55 ; J100.3@52164.62,50623.96 J100.2@52162.05,50701.91 ; J100.3@52164.62,50626.03 J100.2@52177.71,50705.04 ; J100.3@52164.6,50642.13 J100.3@52186.73,50622.55 ; J100.5@52164.64,50320.5 52193.48,50375.96 ; J100.4@52164.66,50429.47 52193.26,50373.94 ; J100.3@52164.64,50620.5 52193.48,50675.96 ; J100.2@52164.66,50729.47 52193.26,50673.94 ; J100.5@52164.7,50342.08 J100.5@52186.8,50322.33 ; J100.4@52164.69,50407.92 J100.4@52186.8,50427.65 ; J100.4@52164.69,50429.42 52192.95,50373.61 ; J100.3@52164.7,50642.08 J100.3@52186.8,50622.33 ; J100.2@52164.69,50707.92 J100.2@52186.8,50727.65 ; J100.2@52164.69,50729.42 52192.95,50673.61 ; J100.5@52164.75,50323.06 J100.4@52155.75,50398.74 ; J100.5@52164.74,50323.11 J100.4@52157.28,50392.23 ; J100.5@52164.76,50342.05 J100.5@52186.84,50322.2 ; J100.4@52164.73,50407.93 J100.4@52186.82,50427.73 ; J100.4@52164.74,50426.89 J100.5@52157.28,50357.77 ; J100.3@52164.75,50623.06 J100.2@52155.75,50698.74 ; J100.3@52164.74,50623.11 J100.2@52157.28,50692.23 ; J100.3@52164.76,50642.05 J100.3@52186.84,50622.2 ; J100.2@52164.73,50707.93 J100.2@52186.82,50727.73 ; J100.2@52164.74,50726.89 J100.3@52157.28,50657.77 ; J100.5@52164.82,50320.81 52191.08,50376.98 ; J100.5@52164.78,50327.12 J100.4@52186.2,50404.66 ; J100.3@52164.82,50620.81 52191.08,50676.98 ; J100.3@52164.78,50627.12 J100.2@52186.2,50704.66 ; J100.5@52164.86,50320.89 52190.48,50377.23 ; J100.5@52164.84,50342.02 J100.5@52186.9,50322.04 ; J100.4@52164.86,50429.11 52190.7,50372.49 ; J100.3@52164.86,50620.89 52190.48,50677.23 ; J100.3@52164.84,50642.02 J100.3@52186.9,50622.04 ; J100.2@52164.86,50729.11 52190.7,50672.49 ; J100.5@52164.93,50321.01 52191.65,50381.6 ; J100.5@52164.96,50321.08 52189.03,50377.65 ; J100.5@52164.97,50341.96 J100.5@52187.02,50321.75 ; J100.5@52164.94,50341.98 J100.5@52186.99,50321.82 ; J100.4@52164.97,50408.04 J100.4@52187.02,50428.25 ; J100.3@52164.93,50621.01 52191.65,50681.6 ; J100.3@52164.96,50621.08 52189.03,50677.65 ; J100.3@52164.97,50641.96 J100.3@52187.02,50621.75 ; J100.3@52164.94,50641.98 J100.3@52186.99,50621.82 ; J100.2@52164.97,50708.04 J100.2@52187.02,50728.25 ; J100.5@52164.98,50308.04 J100.5@52185.15,50327.42 ; J100.5@52164.98,50321.11 52189.17,50378.44 ; J100.5@52165.02,50321.19 52188.3,50378.19 ; J100.5@52165.01,50341.95 J100.5@52187.05,50321.67 ; J100.3@52164.98,50608.04 J100.3@52185.15,50627.42 ; J100.3@52164.98,50621.11 52189.17,50678.44 ; J100.3@52165.02,50621.19 52188.3,50678.19 ; J100.3@52165.01,50641.95 J100.3@52187.05,50621.67 ; J100.5@52165.04,50321.23 52187.28,50376.78 ; J100.3@52165.04,50621.23 52187.28,50676.78 ; J100.4@52165.09,50408.09 J100.4@52187.13,50428.53 ; J100.2@52165.09,50708.09 J100.2@52187.13,50728.53 ; J100.5@52165.15,50321.46 52186.18,50378.67 ; J100.4@52165.17,50428.49 52186,50370.84 ; J100.3@52165.15,50621.46 52186.18,50678.67 ; J100.2@52165.17,50728.49 52186,50670.84 ; J100.5@52165.21,50341.85 J100.5@52187.26,50321.19 ; J100.4@52165.2,50428.41 52185.24,50370.97 ; J100.4@52165.19,50428.44 52183.9,50374.71 ; J100.3@52165.21,50641.85 J100.3@52187.26,50621.19 ; J100.2@52165.2,50728.41 52185.24,50670.97 ; J100.2@52165.19,50728.44 52183.9,50674.71 ; J100.5@52165.25,50341.83 J100.5@52187.32,50321.09 ; J100.3@52165.25,50641.83 J100.3@52187.32,50621.09 ; J100.5@52165.34,50321.92 52182.8,50379.75 ; J100.5@52165.34,50321.94 52182.71,50379.79 ; J100.4@52165.34,50408.21 J100.4@52187.44,50429.15 ; J100.3@52165.34,50621.92 52182.8,50679.75 ; J100.3@52165.34,50621.94 52182.71,50679.79 ; J100.2@52165.34,50708.21 J100.2@52187.44,50729.15 ; J100.4@52165.38,50427.96 52181.94,50370.14 ; J100.2@52165.38,50727.96 52181.94,50670.14 ; J100.5@52165.43,50322.17 52180.95,50380.03 ; J100.5@52165.44,50322.21 52180.25,50378.8 ; J100.4@52165.44,50427.78 52182.68,50363.86 ; J100.3@52165.43,50622.17 52180.95,50680.03 ; J100.3@52165.44,50622.21 52180.25,50678.8 ; J100.2@52165.44,50727.78 52182.68,50663.86 ; J100.5@52165.5,50341.71 J100.5@52187.69,50320.42 ; J100.3@52165.5,50641.71 J100.3@52187.69,50620.42 ; J100.5@52165.54,50341.69 J100.5@52187.77,50320.31 ; J100.3@52165.54,50641.69 J100.3@52187.77,50620.31 ; J100.4@52165.62,50427.22 52176.71,50368.7 ; J100.4@52165.61,50427.25 52176.47,50370.43 ; J100.2@52165.62,50727.22 52176.71,50668.7 ; J100.2@52165.61,50727.25 52176.47,50670.43 ; J100.4@52165.67,50426.99 52176.39,50363.06 ; J100.4@52165.63,50427.16 52176.29,50368.7 ; J100.2@52165.67,50726.99 52176.39,50663.06 ; J100.2@52165.63,50727.16 52176.29,50668.7 ; J100.5@52165.71,50323.17 52173.22,50377.95 ; J100.5@52165.71,50326.85 52149.67,50379.89 ; J100.5@52165.69,50326.92 52148.29,50383.84 ; J100.4@52165.71,50426.83 J100.5@52176.13,50358.42 ; J100.3@52165.71,50623.17 52173.22,50677.95 ; J100.3@52165.71,50626.85 52149.67,50679.89 ; J100.3@52165.69,50626.92 52148.29,50683.84 ; J100.2@52165.71,50726.83 J100.3@52176.13,50658.42 ; J100.5@52165.77,50326.53 52152.02,50378.48 ; J100.4@52165.77,50423.45 52150.93,50366.11 ; J100.4@52165.77,50426.5 52172.17,50365.72 ; J100.4@52165.76,50426.56 52171.54,50371.29 ; J100.3@52165.77,50626.53 52152.02,50678.48 ; J100.2@52165.77,50723.45 52150.93,50666.11 ; J100.2@52165.77,50726.5 52172.17,50665.72 ; J100.2@52165.76,50726.56 52171.54,50671.29 ; J100.5@52165.81,50323.71 52169.69,50378.15 ; J100.5@52165.81,50326.31 52153.1,50380.78 ; J100.4@52165.82,50426.23 52170.54,50363 ; J100.4@52165.8,50426.33 52171.06,50364.9 ; J100.4@52165.78,50426.45 52171.36,50368.23 ; J100.3@52165.81,50623.71 52169.69,50678.15 ; J100.3@52165.81,50626.31 52153.1,50680.78 ; J100.2@52165.82,50726.23 52170.54,50663 ; J100.2@52165.8,50726.33 52171.06,50664.9 ; J100.2@52165.78,50726.45 52171.36,50668.23 ; J100.5@52165.85,50324 52167.92,50378.8 ; J100.5@52165.86,50324.12 52167.42,50381.75 ; J100.5@52165.86,50324.15 J100.4@52169.49,50404.1 ; J100.5@52165.87,50325.77 52156.78,50378.71 ; J100.4@52165.86,50408.47 J100.4@52194.01,50433.57 ; J100.4@52165.83,50423.85 52153.58,50365.06 ; J100.4@52165.85,50424 52155.14,50369.28 ; J100.4@52165.86,50424.08 52155.31,50365.95 ; J100.4@52165.86,50424.16 52155.32,50360.85 ; J100.4@52165.87,50424.23 52156.78,50371.29 ; J100.4@52165.87,50425.74 52166.96,50363.34 ; J100.4@52165.86,50425.89 52167.16,50371.55 ; J100.4@52165.85,50426.01 J100.5@52169.69,50356.67 ; J100.4@52165.86,50441.53 J100.4@52194.01,50416.43 ; J100.3@52165.85,50624 52167.92,50678.8 ; J100.3@52165.86,50624.12 52167.42,50681.75 ; J100.3@52165.86,50624.15 J100.2@52169.49,50704.1 ; J100.3@52165.87,50625.77 52156.78,50678.71 ; J100.2@52165.86,50708.47 J100.2@52194.01,50733.57 ; J100.2@52165.83,50723.85 52153.58,50665.06 ; J100.2@52165.85,50724 52155.14,50669.28 ; J100.2@52165.86,50724.08 52155.31,50665.95 ; J100.2@52165.86,50724.16 52155.32,50660.85 ; J100.2@52165.87,50724.23 52156.78,50671.29 ; J100.2@52165.87,50725.74 52166.96,50663.34 ; J100.2@52165.86,50725.89 52167.16,50671.55 ; J100.2@52165.85,50726.01 J100.3@52169.69,50656.67 ; J100.2@52165.86,50741.53 J100.2@52194.01,50716.43 ; J100.5@52165.89,50324.52 52164.61,50378.55 ; J100.5@52165.9,50324.81 52162.79,50379.28 ; J100.5@52165.91,50324.92 52162.11,50381.58 ; J100.5@52165.91,50324.95 J100.4@52162.05,50401.91 ; J100.5@52165.9,50325.19 52160.17,50388.07 ; J100.5@52165.89,50325.46 52158.67,50379.36 ; J100.5@52165.88,50325.66 52157.29,50381.23 ; J100.5@52165.88,50325.69 52157.28,50378.62 ; J100.4@52165.9,50424.7 52159.4,50362.66 ; J100.4@52165.91,50424.97 52161.39,50361.73 ; J100.4@52165.9,50425.18 J100.5@52163.04,50355.84 ; J100.4@52165.89,50425.47 52164.92,50363.63 ; J100.3@52165.89,50624.52 52164.61,50678.55 ; J100.3@52165.9,50624.81 52162.79,50679.28 ; J100.3@52165.91,50624.92 52162.11,50681.58 ; J100.3@52165.91,50624.95 J100.2@52162.05,50701.91 ; J100.3@52165.9,50625.19 52160.17,50688.07 ; J100.3@52165.89,50625.46 52158.67,50679.36 ; J100.3@52165.88,50625.66 52157.29,50681.23 ; J100.3@52165.88,50625.69 52157.28,50678.62 ; J100.2@52165.9,50724.7 52159.4,50662.66 ; J100.2@52165.91,50724.97 52161.39,50661.73 ; J100.2@52165.9,50725.18 J100.3@52163.04,50655.84 ; J100.2@52165.89,50725.47 52164.92,50663.63 ; J100.5@52167.56,50326.79 J100.4@52150.43,50394.68 ; J100.3@52167.56,50626.79 J100.2@52150.43,50694.68 ; J100.4@52169.95,50411.35 J100.4@52190.4,50443.05 ; J100.4@52169.95,50438.65 J100.4@52190.4,50406.95 ; J100.2@52169.95,50711.35 J100.2@52190.4,50743.05 ; J100.2@52169.95,50738.65 J100.2@52190.4,50706.95 ; J100.4@52170.5,50411.88 J100.4@52199.79,50454.6 ; J100.4@52170.5,50438.12 J100.4@52199.79,50395.4 ; J100.2@52170.5,50711.88 J100.2@52199.79,50754.6 ; J100.2@52170.5,50738.12 J100.2@52199.79,50695.4 ; J100.4@52172.43,50435.84 52202.18,50378.27 ; J100.2@52172.43,50735.84 52202.18,50678.27 ; J100.5@52172.56,50328.33 J100.4@52195.23,50402.91 ; J100.3@52172.56,50628.33 J100.2@52195.23,50702.91 ; J100.4@52172.96,50435.05 52199.31,50376.74 ; J100.2@52172.96,50735.05 52199.31,50676.74 ; J100.4@52173.43,50434.27 52196.52,50375.38 ; J100.2@52173.43,50734.27 52196.52,50675.38 ; J100.5@52173.51,50315.86 52196.1,50374.9 ; J100.3@52173.51,50615.86 52196.1,50674.9 ; J100.5@52173.57,50315.97 52195.68,50375.02 ; J100.3@52173.57,50615.97 52195.68,50675.02 ; J100.5@52173.9,50316.6 52193.48,50375.96 ; J100.3@52173.9,50616.6 52193.48,50675.96 ; J100.4@52173.93,50433.34 52193.26,50373.94 ; J100.2@52173.93,50733.34 52193.26,50673.94 ; J100.4@52173.99,50433.22 52192.95,50373.61 ; J100.2@52173.99,50733.22 52192.95,50673.61 ; J100.5@52174.24,50317.31 52191.08,50376.98 ; J100.3@52174.24,50617.31 52191.08,50676.98 ; J100.5@52174.32,50317.49 52190.48,50377.23 ; J100.4@52174.31,50432.54 52190.7,50372.49 ; J100.3@52174.32,50617.49 52190.48,50677.23 ; J100.2@52174.31,50732.54 52190.7,50672.49 ; J100.5@52174.4,50317.67 52191.65,50381.6 ; J100.3@52174.4,50617.67 52191.65,50681.6 ; J100.4@52174.47,50432.17 52191.14,50368.08 ; J100.2@52174.47,50732.17 52191.14,50668.08 ; J100.5@52174.5,50317.91 52189.03,50377.65 ; J100.5@52174.52,50317.96 52189.17,50378.44 ; J100.3@52174.5,50617.91 52189.03,50677.65 ; J100.3@52174.52,50617.96 52189.17,50678.44 ; J100.5@52174.6,50318.16 52188.3,50378.19 ; J100.3@52174.6,50618.16 52188.3,50678.19 ; J100.5@52174.65,50318.29 52187.28,50376.78 ; J100.3@52174.65,50618.29 52187.28,50676.78 ; J100.5@52174.84,50318.78 52186.18,50378.67 ; J100.5@52174.86,50318.83 52185.94,50378.56 ; J100.5@52174.87,50318.89 52185.8,50378.73 ; J100.4@52174.87,50431.12 52186,50370.84 ; J100.3@52174.84,50618.78 52186.18,50678.67 ; J100.3@52174.86,50618.83 52185.94,50678.56 ; J100.3@52174.87,50618.89 52185.8,50678.73 ; J100.2@52174.87,50731.12 52186,50670.84 ; J100.5@52175.02,50330.66 52148.29,50383.84 ; J100.4@52175.02,50430.69 52184.45,50370.8 ; J100.4@52174.99,50430.78 52186.92,50364.23 ; J100.3@52175.02,50630.66 52148.29,50683.84 ; J100.2@52175.02,50730.69 52184.45,50670.8 ; J100.2@52174.99,50730.78 52186.92,50664.23 ; J100.5@52175.04,50319.39 52183.81,50378.01 ; J100.5@52175.06,50319.45 52182.74,50375.33 ; J100.5@52175.04,50330.62 52149.67,50379.89 ; J100.3@52175.04,50619.39 52183.81,50678.01 ; J100.3@52175.06,50619.45 52182.74,50675.33 ; J100.3@52175.04,50630.62 52149.67,50679.89 ; J100.5@52175.17,50319.83 52182.8,50379.75 ; J100.3@52175.17,50619.83 52182.8,50679.75 ; J100.5@52175.18,50319.86 52182.71,50379.79 ; J100.5@52175.22,50330.01 52152.02,50378.48 ; J100.3@52175.18,50619.86 52182.71,50679.79 ; J100.3@52175.22,50630.01 52152.02,50678.48 ; J100.4@52175.25,50420.12 52150.93,50366.11 ; J100.4@52175.25,50429.91 52181.94,50370.14 ; J100.2@52175.25,50720.12 52150.93,50666.11 ; J100.2@52175.25,50729.91 52181.94,50670.14 ; J100.4@52175.3,50429.71 52181.27,50370.06 ; J100.2@52175.3,50729.71 52181.27,50670.06 ; J100.5@52175.33,50320.39 52180.95,50380.03 ; J100.5@52175.36,50320.51 52180.25,50378.8 ; J100.5@52175.36,50329.46 52153.1,50380.78 ; J100.4@52175.33,50429.61 52180.44,50371.92 ; J100.3@52175.33,50620.39 52180.95,50680.03 ; J100.3@52175.36,50620.51 52180.25,50678.8 ; J100.3@52175.36,50629.46 52153.1,50680.78 ; J100.2@52175.33,50729.61 52180.44,50671.92 ; J100.4@52175.41,50429.28 52181.97,50361.01 ; J100.2@52175.41,50729.28 52181.97,50661.01 ; J100.4@52175.47,50420.98 52153.58,50365.06 ; J100.4@52175.45,50429.08 52179.28,50369.54 ; J100.2@52175.47,50720.98 52153.58,50665.06 ; J100.2@52175.45,50729.08 52179.28,50669.54 ; J100.5@52175.51,50328.81 52155.14,50380.72 ; J100.5@52175.51,50328.84 52155.48,50378.7 ; J100.4@52175.51,50421.19 52155.14,50369.28 ; J100.3@52175.51,50628.81 52155.14,50680.72 ; J100.3@52175.51,50628.84 52155.48,50678.7 ; J100.2@52175.51,50721.19 52155.14,50669.28 ; J100.5@52175.53,50328.73 52154.64,50384.47 ; J100.4@52175.56,50421.45 52155.31,50365.95 ; J100.3@52175.53,50628.73 52154.64,50684.47 ; J100.2@52175.56,50721.45 52155.31,50665.95 ; J100.5@52175.6,50321.66 52176.95,50380.93 ; J100.5@52175.61,50321.69 52176.91,50381.32 ; J100.5@52175.62,50328.23 52157.28,50378.62 ; J100.5@52175.59,50328.4 52156.78,50378.71 ; J100.4@52175.59,50421.6 52156.78,50371.29 ; J100.3@52175.6,50621.66 52176.95,50680.93 ; J100.3@52175.61,50621.69 52176.91,50681.32 ; J100.3@52175.62,50628.23 52157.28,50678.62 ; J100.3@52175.59,50628.4 52156.78,50678.71 ; J100.2@52175.59,50721.6 52156.78,50671.29 ; J100.5@52175.67,50327.93 52158.05,50379.43 ; J100.5@52175.65,50328.08 52157.29,50381.23 ; J100.4@52175.64,50428.12 52176.29,50368.7 ; J100.3@52175.67,50627.93 52158.05,50679.43 ; J100.3@52175.65,50628.08 52157.29,50681.23 ; J100.2@52175.64,50728.12 52176.29,50668.7 ; J100.5@52175.71,50327.72 52158.67,50379.36 ; J100.4@52175.69,50422.15 J100.5@52155.99,50355.89 ; J100.4@52175.71,50422.28 52158.67,50370.64 ; J100.4@52175.72,50427.62 J100.5@52176.13,50358.42 ; J100.4@52175.68,50427.87 52176.39,50363.06 ; J100.3@52175.71,50627.72 52158.67,50679.36 ; J100.2@52175.69,50722.15 J100.3@52155.99,50655.89 ; J100.2@52175.71,50722.28 52158.67,50670.64 ; J100.2@52175.72,50727.62 J100.3@52176.13,50658.42 ; J100.2@52175.68,50727.87 52176.39,50663.06 ; J100.5@52175.73,50322.46 J100.4@52177.71,50405.04 ; J100.5@52175.76,50322.71 52173.22,50377.95 ; J100.5@52175.76,50327.36 52159.82,50378.72 ; J100.4@52175.73,50422.46 52158.65,50366.65 ; J100.3@52175.73,50622.46 J100.2@52177.71,50705.04 ; J100.3@52175.76,50622.71 52173.22,50677.95 ; J100.3@52175.76,50627.36 52159.82,50678.72 ; J100.2@52175.73,50722.46 52158.65,50666.65 ; J100.5@52175.79,50322.91 52173.05,50381.71 ; J100.5@52175.78,50327.19 52159.83,50382.56 ; J100.4@52175.78,50422.81 52159.83,50367.44 ; J100.4@52175.78,50422.85 52159.4,50362.66 ; J100.4@52175.79,50422.89 52159.79,50364.79 ; J100.4@52175.82,50426.73 52172.17,50365.72 ; J100.3@52175.79,50622.91 52173.05,50681.71 ; J100.3@52175.78,50627.19 52159.83,50682.56 ; J100.2@52175.78,50722.81 52159.83,50667.44 ; J100.2@52175.78,50722.85 52159.4,50662.66 ; J100.2@52175.79,50722.89 52159.79,50664.79 ; J100.2@52175.82,50726.73 52172.17,50665.72 ; J100.5@52175.85,50323.58 52171.01,50382.36 ; J100.5@52175.87,50323.92 52169.69,50378.15 ; J100.5@52175.87,50326.1 J100.4@52162.05,50401.91 ; J100.5@52175.86,50326.31 52162.79,50379.28 ; J100.5@52175.85,50326.48 52162.11,50381.58 ; J100.4@52175.84,50423.46 52161.39,50361.73 ; J100.4@52175.87,50423.85 52163.14,50368.83 ; J100.4@52175.87,50426.18 52170.54,50363 ; J100.4@52175.85,50426.37 52171.06,50364.9 ; J100.4@52175.84,50426.55 52171.36,50368.23 ; J100.4@52175.83,50426.69 52171.54,50371.29 ; J100.3@52175.85,50623.58 52171.01,50682.36 ; J100.3@52175.87,50623.92 52169.69,50678.15 ; J100.3@52175.87,50626.1 J100.2@52162.05,50701.91 ; J100.3@52175.86,50626.31 52162.79,50679.28 ; J100.3@52175.85,50626.48 52162.11,50681.58 ; J100.2@52175.84,50723.46 52161.39,50661.73 ; J100.2@52175.87,50723.85 52163.14,50668.83 ; J100.2@52175.87,50726.18 52170.54,50663 ; J100.2@52175.85,50726.37 52171.06,50664.9 ; J100.2@52175.84,50726.55 52171.36,50668.23 ; J100.2@52175.83,50726.69 52171.54,50671.29 ; J100.5@52175.89,50324.32 J100.4@52169.49,50404.1 ; J100.5@52175.9,50324.54 52167.92,50378.8 ; J100.5@52175.9,50324.73 52167.42,50381.75 ; J100.5@52175.9,50325.43 52165.25,50382.86 ; J100.5@52175.89,50325.69 52164.61,50378.55 ; J100.4@52175.88,50424.04 J100.5@52163.04,50355.84 ; J100.4@52175.9,50424.49 52164.92,50363.63 ; J100.4@52175.91,50425.11 52166.96,50363.34 ; J100.4@52175.9,50425.2 52167.16,50371.55 ; J100.4@52175.89,50425.84 J100.5@52169.69,50356.67 ; J100.3@52175.89,50624.32 J100.2@52169.49,50704.1 ; J100.3@52175.9,50624.54 52167.92,50678.8 ; J100.3@52175.9,50624.73 52167.42,50681.75 ; J100.3@52175.9,50625.43 52165.25,50682.86 ; J100.3@52175.89,50625.69 52164.61,50678.55 ; J100.2@52175.88,50724.04 J100.3@52163.04,50655.84 ; J100.2@52175.9,50724.49 52164.92,50663.63 ; J100.2@52175.91,50725.11 52166.96,50663.34 ; J100.2@52175.9,50725.2 52167.16,50671.55 ; J100.2@52175.89,50725.84 J100.3@52169.69,50656.67 ; J100.5@52176.39,50324.23 52183.26,50383.76 ; J100.5@52176.39,50324.34 52183.81,50378.01 ; J100.5@52176.38,50325.09 52185.95,50379.6 ; J100.5@52176.38,50325.29 52186.55,50380.7 ; J100.5@52176.42,50326.24 52189.23,50378.46 ; J100.4@52176.39,50424.29 J100.5@52188.22,50358.46 ; J100.4@52176.38,50424.95 52185.83,50367.34 ; J100.4@52176.38,50425.3 52184.78,50368.55 ; J100.4@52176.41,50426.02 J100.5@52182.09,50359.79 ; J100.3@52176.39,50624.23 52183.26,50683.76 ; J100.3@52176.39,50624.34 52183.81,50678.01 ; J100.3@52176.38,50625.09 52185.95,50679.6 ; J100.3@52176.38,50625.29 52186.55,50680.7 ; J100.3@52176.42,50626.24 52189.23,50678.46 ; J100.2@52176.39,50724.29 J100.3@52188.22,50658.46 ; J100.2@52176.38,50724.95 52185.83,50667.34 ; J100.2@52176.38,50725.3 52184.78,50668.55 ; J100.2@52176.41,50726.02 J100.3@52182.09,50659.79 ; J100.5@52176.47,50323.14 52180.25,50378.8 ; J100.5@52176.44,50323.44 52180.99,50380.64 ; J100.5@52176.43,50326.35 52190.1,50386.03 ; J100.4@52176.45,50423.42 52190.73,50365.44 ; J100.4@52176.43,50423.65 52189.67,50369.78 ; J100.4@52176.44,50426.47 52181.3,50369.77 ; J100.3@52176.47,50623.14 52180.25,50678.8 ; J100.3@52176.44,50623.44 52180.99,50680.64 ; J100.3@52176.43,50626.35 52190.1,50686.03 ; J100.2@52176.45,50723.42 52190.73,50665.44 ; J100.2@52176.43,50723.65 52189.67,50669.78 ; J100.2@52176.44,50726.47 52181.3,50669.77 ; J100.5@52176.48,50326.96 52191.58,50381.19 ; J100.5@52176.5,50327.16 52192.12,50380.56 ; J100.5@52176.52,50327.28 J100.4@52195.23,50402.91 ; J100.4@52176.49,50427.03 52179.36,50367.87 ; J100.3@52176.48,50626.96 52191.58,50681.19 ; J100.3@52176.5,50627.16 52192.12,50680.56 ; J100.3@52176.52,50627.28 J100.2@52195.23,50702.91 ; J100.2@52176.49,50727.03 52179.36,50667.87 ; J100.5@52176.54,50322.53 52178.6,50377.34 ; J100.4@52176.55,50422.46 J100.5@52194.82,50357.93 ; J100.3@52176.54,50622.53 52178.6,50677.34 ; J100.2@52176.55,50722.46 J100.3@52194.82,50657.93 ; J100.5@52176.58,50322.26 52176.96,50382.89 ; J100.4@52176.61,50422.05 52194.21,50371.21 ; J100.4@52176.58,50427.73 52176.25,50361.98 ; J100.4@52176.61,50427.9 52177.25,50372.26 ; J100.3@52176.58,50622.26 52176.96,50682.89 ; J100.2@52176.61,50722.05 52194.21,50671.21 ; J100.2@52176.58,50727.73 52176.25,50661.98 ; J100.2@52176.61,50727.9 52177.25,50672.26 ; J100.5@52176.67,50321.69 52175.55,50380.35 ; J100.5@52176.63,50328.04 52194.45,50378.71 ; J100.4@52176.65,50421.8 52196.16,50364.11 ; J100.3@52176.67,50621.69 52175.55,50680.35 ; J100.3@52176.63,50628.04 52194.45,50678.71 ; J100.2@52176.65,50721.8 52196.16,50664.11 ; J100.5@52176.75,50321.32 52174.89,50377.66 ; J100.3@52176.75,50621.32 52174.89,50677.66 ; J100.5@52176.82,50329.03 52197.6,50379.7 ; J100.3@52176.82,50629.03 52197.6,50679.7 ; J100.5@52176.85,50320.85 52173.67,50376.54 ; J100.3@52176.85,50620.85 52173.67,50676.54 ; J100.5@52176.91,50329.43 52199.76,50383.59 ; J100.4@52176.9,50420.63 52198.51,50370.79 ; J100.4@52176.88,50429.28 52173.34,50373.76 ; J100.4@52176.89,50429.33 52171.06,50364.9 ; J100.3@52176.91,50629.43 52199.76,50683.59 ; J100.2@52176.9,50720.63 52198.51,50670.79 ; J100.2@52176.88,50729.28 52173.34,50673.76 ; J100.2@52176.89,50729.33 52171.06,50664.9 ; J100.5@52176.95,50320.42 52171.06,50381.53 ; J100.3@52176.95,50620.42 52171.06,50681.53 ; J100.5@52177.04,50320.08 52170.33,50379.86 ; J100.3@52177.04,50620.08 52170.33,50679.86 ; J100.5@52177.11,50329.95 J100.4@52150.43,50394.68 ; J100.3@52177.11,50629.95 J100.2@52150.43,50694.68 ; J100.5@52177.15,50319.68 52169.98,50376.33 ; J100.3@52177.15,50619.68 52169.98,50676.33 ; J100.5@52177.26,50319.35 52169.09,50375.68 ; J100.5@52177.23,50319.43 52168.28,50379.15 ; J100.4@52177.27,50419.3 52203.09,50369.42 ; J100.4@52177.23,50430.57 52168.28,50370.85 ; J100.3@52177.26,50619.35 52169.09,50675.68 ; J100.3@52177.23,50619.43 52168.28,50679.15 ; J100.2@52177.27,50719.3 52203.09,50669.42 ; J100.2@52177.23,50730.57 52168.28,50670.85 ; J100.5@52177.4,50318.9 52167.7,50375.34 ; J100.4@52177.4,50431.1 52167.7,50374.66 ; J100.3@52177.4,50618.9 52167.7,50675.34 ; J100.2@52177.4,50731.1 52167.7,50674.66 ; J100.5@52177.44,50318.8 52165.76,50379.83 ; J100.3@52177.44,50618.8 52165.76,50679.83 ; J100.5@52177.64,50318.25 52165.6,50374.94 ; J100.3@52177.64,50618.25 52165.6,50674.94 ; J100.5@52177.74,50318.02 52164.85,50374.72 ; J100.4@52177.74,50431.98 52164.85,50375.28 ; J100.3@52177.74,50618.02 52164.85,50674.72 ; J100.2@52177.74,50731.98 52164.85,50675.28 ; J100.4@52177.78,50417.91 52208.23,50368.44 ; J100.4@52177.78,50432.09 52163.17,50372.15 ; J100.2@52177.78,50717.91 52208.23,50668.44 ; J100.2@52177.78,50732.09 52163.17,50672.15 ; J100.5@52177.99,50317.41 52161.17,50377.99 ; J100.4@52178.01,50432.63 52161.1,50372.23 ; J100.3@52177.99,50617.41 52161.17,50677.99 ; J100.2@52178.01,50732.63 52161.1,50672.23 ; J100.5@52178.47,50316.42 52158.48,50375.14 ; J100.4@52178.45,50416.46 J100.4@52199.79,50395.4 ; J100.4@52178.45,50433.54 J100.4@52199.79,50454.6 ; J100.3@52178.47,50616.42 52158.48,50675.14 ; J100.2@52178.45,50716.46 J100.2@52199.79,50695.4 ; J100.2@52178.45,50733.54 J100.2@52199.79,50754.6 ; J100.5@52178.68,50316.04 52154.09,50380.19 ; J100.3@52178.68,50616.04 52154.09,50680.19 ; J100.5@52182.33,50326.03 J100.4@52195.23,50402.91 ; J100.3@52182.33,50626.03 J100.2@52195.23,50702.91 ; J100.5@52184.86,50328.41 J100.4@52157.28,50392.23 ; J100.4@52184.86,50421.59 J100.5@52157.28,50357.77 ; J100.3@52184.86,50628.41 J100.2@52157.28,50692.23 ; J100.2@52184.86,50721.59 J100.3@52157.28,50657.77 ; J100.5@52184.89,50328.32 J100.4@52155.75,50398.74 ; J100.3@52184.89,50628.32 J100.2@52155.75,50698.74 ; J100.5@52186.2,50334.49 J100.4@52150.43,50394.68 ; J100.3@52186.2,50634.49 J100.2@52150.43,50694.68 ; J100.5@52186.41,50324.26 52185.95,50379.6 ; J100.5@52186.4,50324.36 52186.55,50380.7 ; J100.5@52186.38,50324.76 52189.23,50378.46 ; J100.5@52186.38,50324.92 52190.1,50386.03 ; J100.5@52186.38,50325.14 52191.58,50381.19 ; J100.5@52186.38,50325.22 52192.12,50380.56 ; J100.5@52186.39,50325.5 J100.4@52195.23,50402.91 ; J100.5@52186.4,50325.6 52194.45,50378.71 ; J100.4@52186.41,50424.23 52196.16,50364.11 ; J100.4@52186.38,50424.99 52190.73,50365.44 ; J100.4@52186.38,50425.16 52189.67,50369.78 ; J100.4@52186.38,50425.32 J100.5@52188.22,50358.46 ; J100.4@52186.41,50425.72 52185.83,50367.34 ; J100.4@52186.42,50425.89 52184.78,50368.55 ; J100.3@52186.41,50624.26 52185.95,50679.6 ; J100.3@52186.4,50624.36 52186.55,50680.7 ; J100.3@52186.38,50624.76 52189.23,50678.46 ; J100.3@52186.38,50624.92 52190.1,50686.03 ; J100.3@52186.38,50625.14 52191.58,50681.19 ; J100.3@52186.38,50625.22 52192.12,50680.56